# Altium PCB KC_BaseBoard4CompareTest-V0.1_NT_MIRR.PcbDoc
Units mil, origin at the board's own origin, x right, y up, seen from the top; angles counter-clockwise.
Board outline 5585 x 2760 mil, 2 copper layers (Component Side, Bottom Layer), stack 12.8 mil thick; 38 components, 24 nets, 93 pads, 1 vias.
Unrouted connection lines stored in the file: 66.
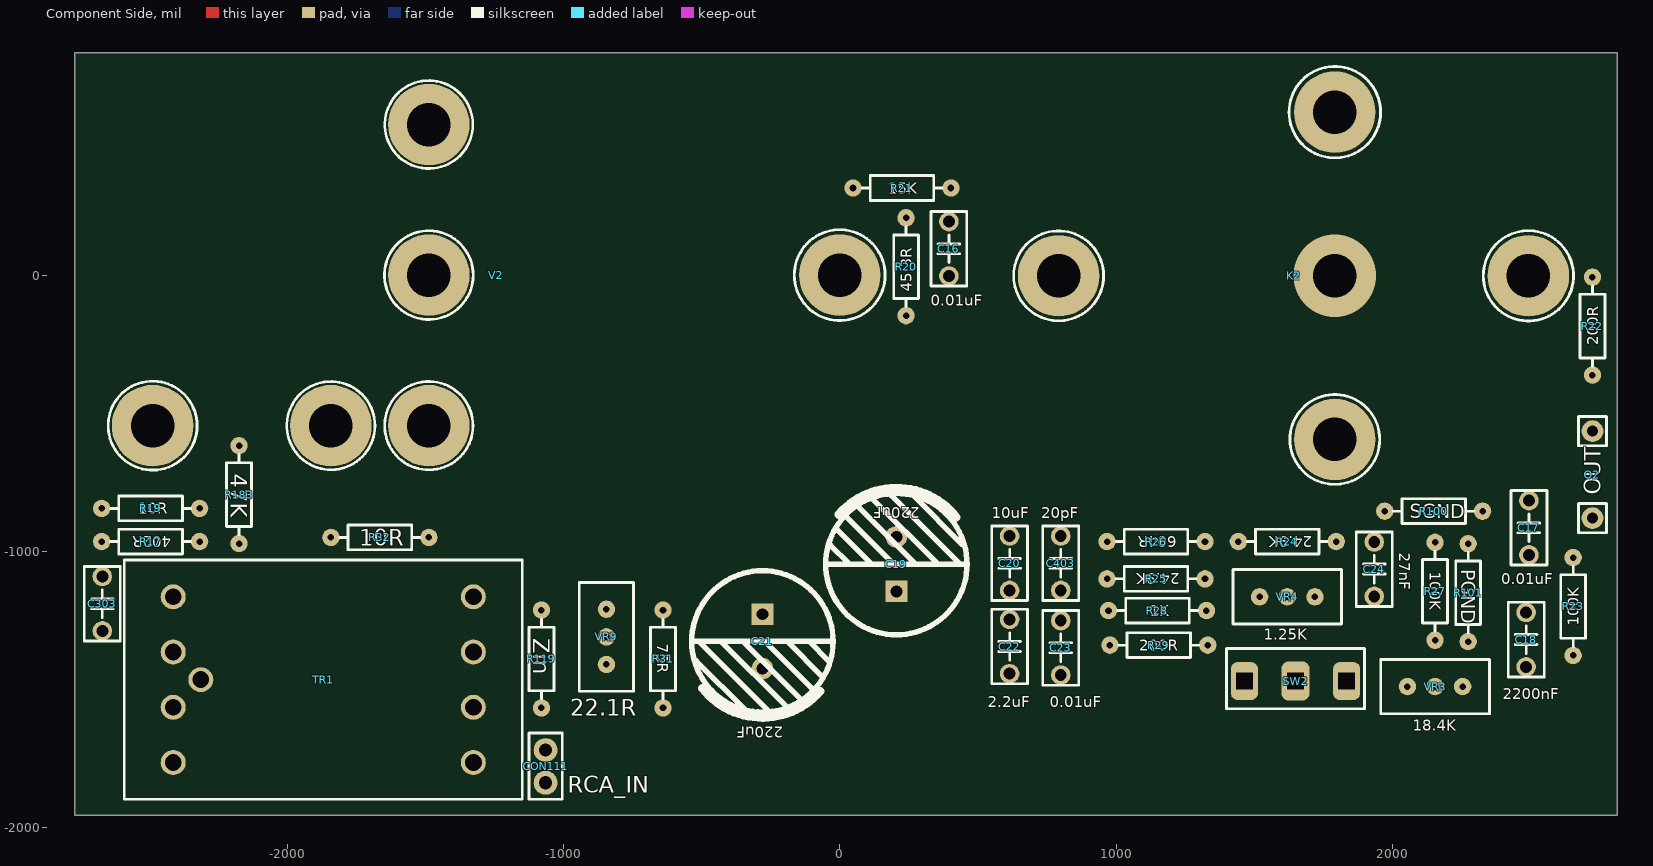
[diagram p0: Component Side view]
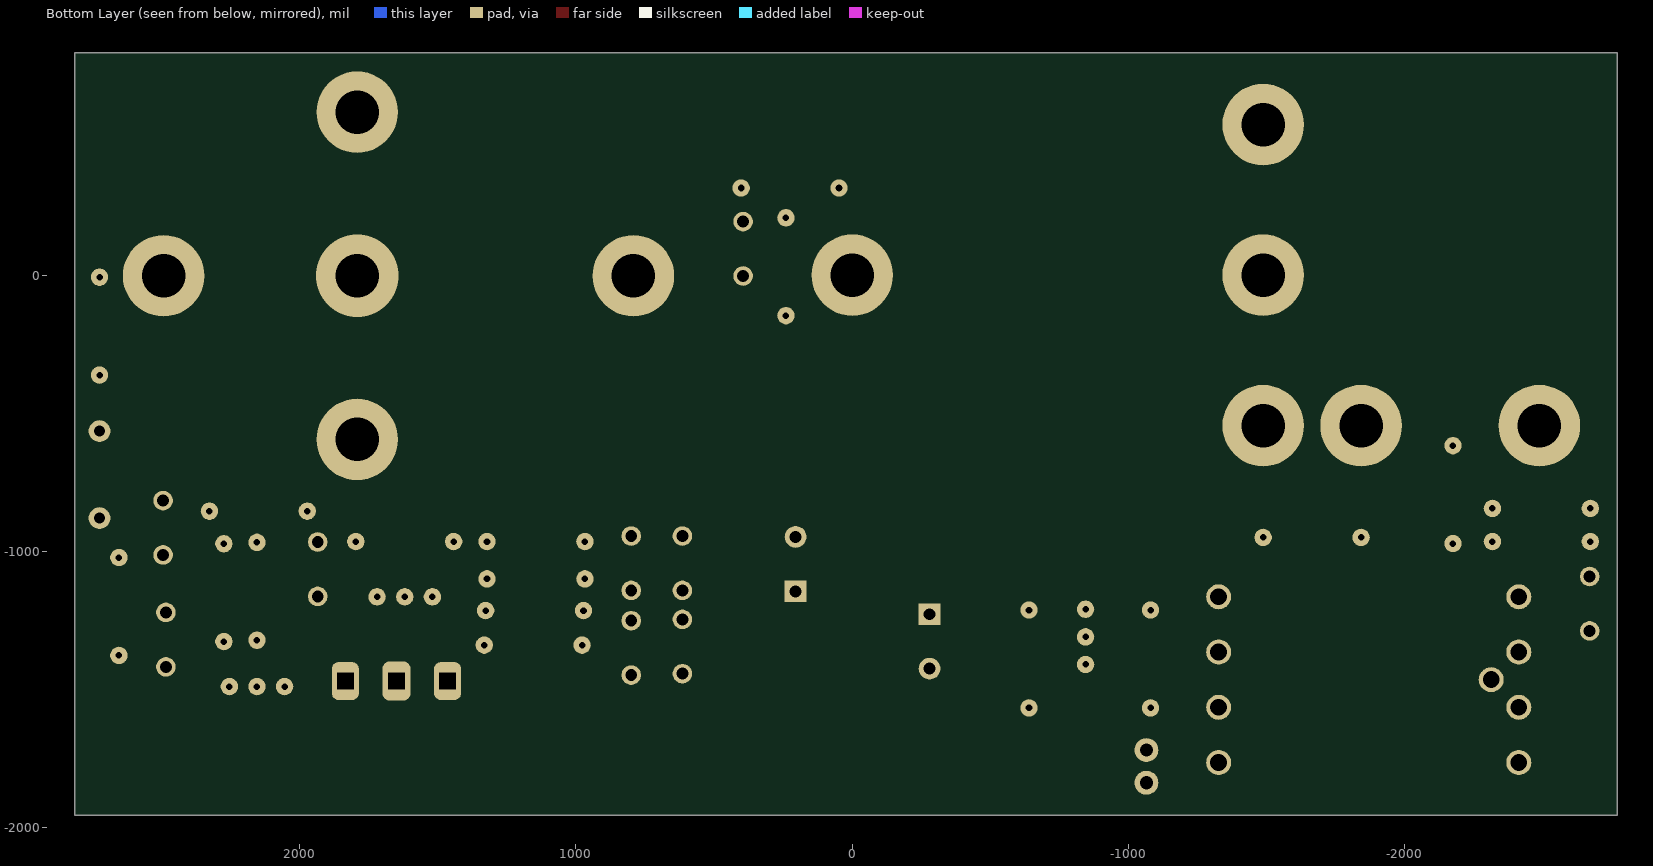
[diagram p1: Bottom Layer view, seen from below]

## Layer stack, top to bottom
Top Solder: solder mask 0.4, Solder Resist, Dk 3.5
Component Side: signal copper 1.4
Dielectric 1: core 10, FR-4, Dk 4.2
Bottom Layer: signal copper 1.4
Solder Side: solder mask 0.4, Solder Resist, Dk 3.5

## Board outline
-2770,-1955 2815,-1955 2815,805 -2770,805

## Design rules (kind name [scope] priority, off if disabled: settings)
Clearance [All] p1: gap=10 ignorepadtopadclearanceinfootprint=FALSE except(0: Arc-Hole Track-Hole SMDPad-Hole THPad-Hole Via-Hole Fill-Hole Poly-Hole Region-Hole Text-Hole)
PolygonConnect [All] p1: connectstyle=Relief reliefconductorwidth=10 reliefentries=4 polygonreliefangle="90 Angle" airgapwidth=10
RoomDefinition KC_BaseBoard4CompareTest-V0.1_NT_MIRR [InComponentClass('KC_BaseBoard4CompareTest-V0.1_NT_MIRR')] p1: confinementstyle=ConfineIn formatcopy=TRUE lockcomponents=FALSE outline -9830.33,-7610.33 -7830.33,-7610.33 -7830.33,-6610.33 -9830.33,-6610.33
RoutingVias [All] p1: holewidth=28 width=50 viastyle="Through Hole" minholewidth=28 minwidth=50 maxholewidth=28 maxwidth=50
SolderMaskExpansion [All] p1: expansion=4
Width [All] p1: maxlimit=500 minlimit=10 preferedwidth=50
30 further rules are at their usual default settings.

## Components (designator, comment, footprint, x,y, rotation, side; value= is the part's Value field where it differs from the comment)
C16 "0.01uF" "CBB 6.3*6.3*5" 395,95 r90 top
C17 "0.01uF" "CBB 6.3*6.3*5" 2495,-915 r90 top
C18 "2200nF" "CBB 6.3*6.3*5" 2485,-1320 r270 top
C19 "220uF" "CAP 5.0*12.5*20" 205,-1046.57 r90 top
C20 "10uF" "CBB 6.3*6.3*5" 615,-1043.43 r90 top
C21 "220uF" "CAP 5.0*12.5*20" -280,-1326.58 r270 top
C22 "2.2uF" "CBB 6.3*6.3*5" 615,-1345 r270 top
C23 "0.01uF" "CBB 6.3*6.3*5" 800,-1350 r270 top
C24 "27nF" "CBB 6.3*6.3*5" 1935,-1065 r270 top
C303 "20pF" "CBB 6.3*6.3*5" -2670,-1190 r90 top
C403 "20pF" "CBB 6.3*6.3*5" 800,-1043.43 r90 top
CON111 "RCA_IN" RCA-WIRE -1065,-1838.11 r90 top
K2 "KCBuff" KCBUFF_M4 792.27,-2.83 r0 top
O2 "OUT" SIGNAL_TERMINAL 2725,-565.04 r270 top
R17 "402R" "RS 1/4W" -2495,-965 r180 top
R19 "10R" "RS 1/4W" -2495,-845 r0 top
R20 "45.3R" "RS 1/4W" 240,30 r90 top
R21 "15K" "RS 1/4W" 225,315 r180 top
R22 "200R" "RS 1/4W" 2725,-185 r90 top
R23 "100K" "RS 1/4W" 2655,-1200 r270 top
R24 "24.9K" "RS 1/4W" 1620,-965 r0 top
R25 "24.9K" "RS 1/4W" 1145,-1100 r0 top
R26 "604R" "RS 1/4W" 1145,-965 r0 top
R27 "100K" "RS 1/4W" 2155,-1145 r270 top
R28 "1K" "RS 1/4W" 1150,-1215 r0 top
R29 "200R" "RS 1/4W" 1155,-1340 r180 top
R31 "75R" "RS 1/4W" -640,-1390 r270 top
R32 "10R" "RS 1/4W" -1665,-950 r180 top
R100 "SGND" "RS 1/4W" 2150,-855 r0 top
R101 "PGND" "RS 1/4W" 2275,-1150 r270 top
R119 "Zin" "RS 1/4W" -1080,-1390 r90 top
R183 "47K" "RS 1/4W" -2175,-795 r270 top
SW2 "SW-3P-2S" SS-12D06 1650,-1470 r0 top
TR1 "LL1527" LL1527 -1870,-1465 r180 top
V2 "KCInputVas" KCIN_VAS_M4 -2487.83,-545.33 r0 top
VR3 "18.4K" "RS 1/2W-VR" 2155,-1490 r180 top
VR4 "1.25K" "RS 1/2W-VR" 1620,-1165 r180 top
VR9 "22.1R" "RS 1/2W-VR" -845,-1310 r90 top

## Footprints (in the part's own frame and the unit in brackets; to place one, negate y for a bottom-side part, rotate by r counter-clockwise, add the part's x,y. Pads: shape width x height; smd on the part's side, far side on the other; paste and mask are expansions set on the pad)
"CAP 5.0*12.5*20" [mm] "脚距5mm直径12.5mm高度20mm"
  rect 2x2 hole 1.1: 1(-2.5,0)
  round 2 hole 1.1: 2(2.5,0)
  silkscreen extent -6.5,-6.5 6.99,6.5, body extent -6.25,-6.25 6.26,6.25, height 20.03
"CBB 6.3*6.3*5" [mm] "脚距5mm高6.3mm厚3mm"
  round 1.8 hole 1.1: 1(-2.5,0) 2(2.5,0)
  silkscreen extent -3.43,-1.65 3.43,1.65, body extent -3.15,-1.5 3.15,1.5, height 6.8
KCBUFF_M4 [mm]
  round 7.5 hole 4: 1(0,0) 2(43.199,0) 3(25.397,15.05) 4(25.397,-15.05)
  silkscreen extent -4.13,-19.18 47.35,19.25
KCIN_VAS_M4 [mm]
  round 7.5 hole 4: 1(0,0) 2(16.396,0) 3(25.4,27.686) 4(25.4,0) 5(25.4,13.843) 6(63.183,13.843)
  silkscreen extent -4.09,-4.09 67.36,31.73
LL1527 [mm] "Lundahl LL1527"
  round 2.3 hole 1.55: 1(-13.8,-7.62) 2(-13.8,-2.54) 3(-13.8,2.54) 4(-13.8,7.62) 5(13.8,-7.62) 6(13.8,-2.54) 7(13.8,2.54) 8(13.8,7.62) 9(11.26,0)
  silkscreen extent -18.3,-11 18.3,11
RCA-WIRE [mm] "RCA pin for wire"
  round 2.2 hole 1.2: 1(0,0) 2(3,0)
  silkscreen extent -1.52,-1.52 4.57,1.52
"RS 1/2W-VR" [mm] "直插3脚顶调可调电阻，脚距2.54mm，长10mm*宽5mm*高10mm"
  round 1.6 hole 0.6: 1(-2.54,0) 2(2.54,0) 3(0,0)
  silkscreen extent -5,-2.5 5,2.5
"RS 1/4W" [mm] "直插色环电阻，脚距9mm，直径2.3mm"
  round 1.6 hole 0.6: 1(-4.5,0) 2(4.5,0)
  silkscreen extent -3.68,-1.14 3.68,1.14, body extent -4.72,-1.16 4.73,1.16, height 2.32
SIGNAL_TERMINAL [mm] "Signal Path Pin"
  round 2 hole 1: 1(0,0) 2(8,0)
  silkscreen extent -1.35,-1.3 9.35,1.3
SS-12D06 [mm]
  rrect50% 2.5x3.5 hole 1.5 square: 1(-4.7,0) 3(4.7,0)
  rrect50% 2.6x3.6 hole 1.5 square: 2(0,0)
  silkscreen extent -6.35,-2.54 6.35,3

## Part data
C16 C17 C18 C19 C20 C21 C22 C23 C24 C303 C403: library part C-CBB, "CBB电容", BOM名称=CBB电容, 学习资源=www.ooocke.com, 版权归属=源创客
CON111: library part RCA, "RCA Connector", Publisher="Altium Limited", Revision="17-Jul-2002: Re-released for DXP Platform."
K2: "King Cello Buffer Stage"
O2: library part Signal_Out, "Signal Out"
R17 R19 R20 R21 R22 R23 R24 R25 R26 R27 R28 R29 R31 R32 R100 R101 R119 R183: library part R-CRR, "直插色环电阻", BOM名称=色环电阻, 学习资源=www.ooocke.com, 版权归属=源创客
SW2: "3 Pin 2 Switch"
TR1: "Lundahl LL1527"
V2: "King Cello Input Stage and VAS"
VR3 VR4 VR9: library part VR-W, "直插可调电阻-顶调"

## Via types
v1: diameter 300, hole 158, Component Side to Bottom Layer, 1 vias

## Nets (pads, with @x,y where several pads share a name; then routed paths per layer and width w, separated by ;. In a path a pad name is that pad's centre, name@x,y a point inside that pad or via, vN(x,y) a via of type N, cw(c..) or ccw(c..) an arc to the next point about the centre after c; other vN are vias at no path point)
GND: R101.1
  other v1: 1792.17,-2.84
NetC16_1: C16.1 K2.1 R20.2
NetC16_2: C16.2 R21.1
NetC17_1: C17.1 C17.2 C18.1 O2.1 R22.1 R23.1
NetC18_2: C18.2 O2.2 R23.2 R100.2 R101.2
NetC19_1: C19.1 C20.1 R26.1
NetC19_2: C19.2 C20.2 C303.1 CON111.2 R21.2 R31.1 R100.1 R119.2 R183.1 TR1.2 TR1.7 TR1.9 V2.5 VR9.2
NetC21_1: C21.1 C22.1 C23.1 C403.1 R25.1 R32.1
NetC21_2: C21.2 C22.2 C23.2 R29.2 R31.2 VR9.1 VR9.3
NetC24_1: C24.1 K2.2 R22.2 R24.2 R27.1 | length 69.5
  Component Side w50: K2.2 K2.2@2562.5,-2.83
NetC24_2: C24.2 VR4.1 VR4.3
NetC303_2: C303.2 R17.2 R19.1
NetC403_2: C403.2 R20.1 V2.6 | length 0.5
  Component Side w50: V2.6 V2.6@0,0
NetCON111_1: CON111.1 R119.1 TR1.4
NetR17_1: R17.1 R183.2 TR1.5
NetR19_2: R19.2 V2.1
NetR24_1: R24.1 R25.2 R26.2
NetR27_2: R27.2 VR3.1 VR3.3
NetR28_1: R28.1 R29.1 SW2.1
NetR28_2: R28.2 SW2.2 VR4.2
NetR32_2: R32.2 V2.2
NetSW2_3: SW2.3 VR3.2
NetTR1_1: TR1.1 TR1.3
NetTR1_6: TR1.6 TR1.8
pads on no net: K2.3 K2.4 V2.3 V2.4

## Silkscreen, mask and mechanical layers (free items; w line width, h text height)
Mechanical 1:
  lines w10: -2770,-1955 -2770,810 2815,810 2815,-1955 -2770,-1955
Drill Drawing:
  the board outline again, w10